# Altium PCB AdaptadorUSB1.PCBDOC
Units mm, origin at the board's own origin, x right, y up, seen from the top; angles counter-clockwise.
Board outline 152.4 x 101.6 mm, 2 copper layers (Top Layer, Bottom Layer); 15 components, 35 nets, 114 pads, 0 vias.
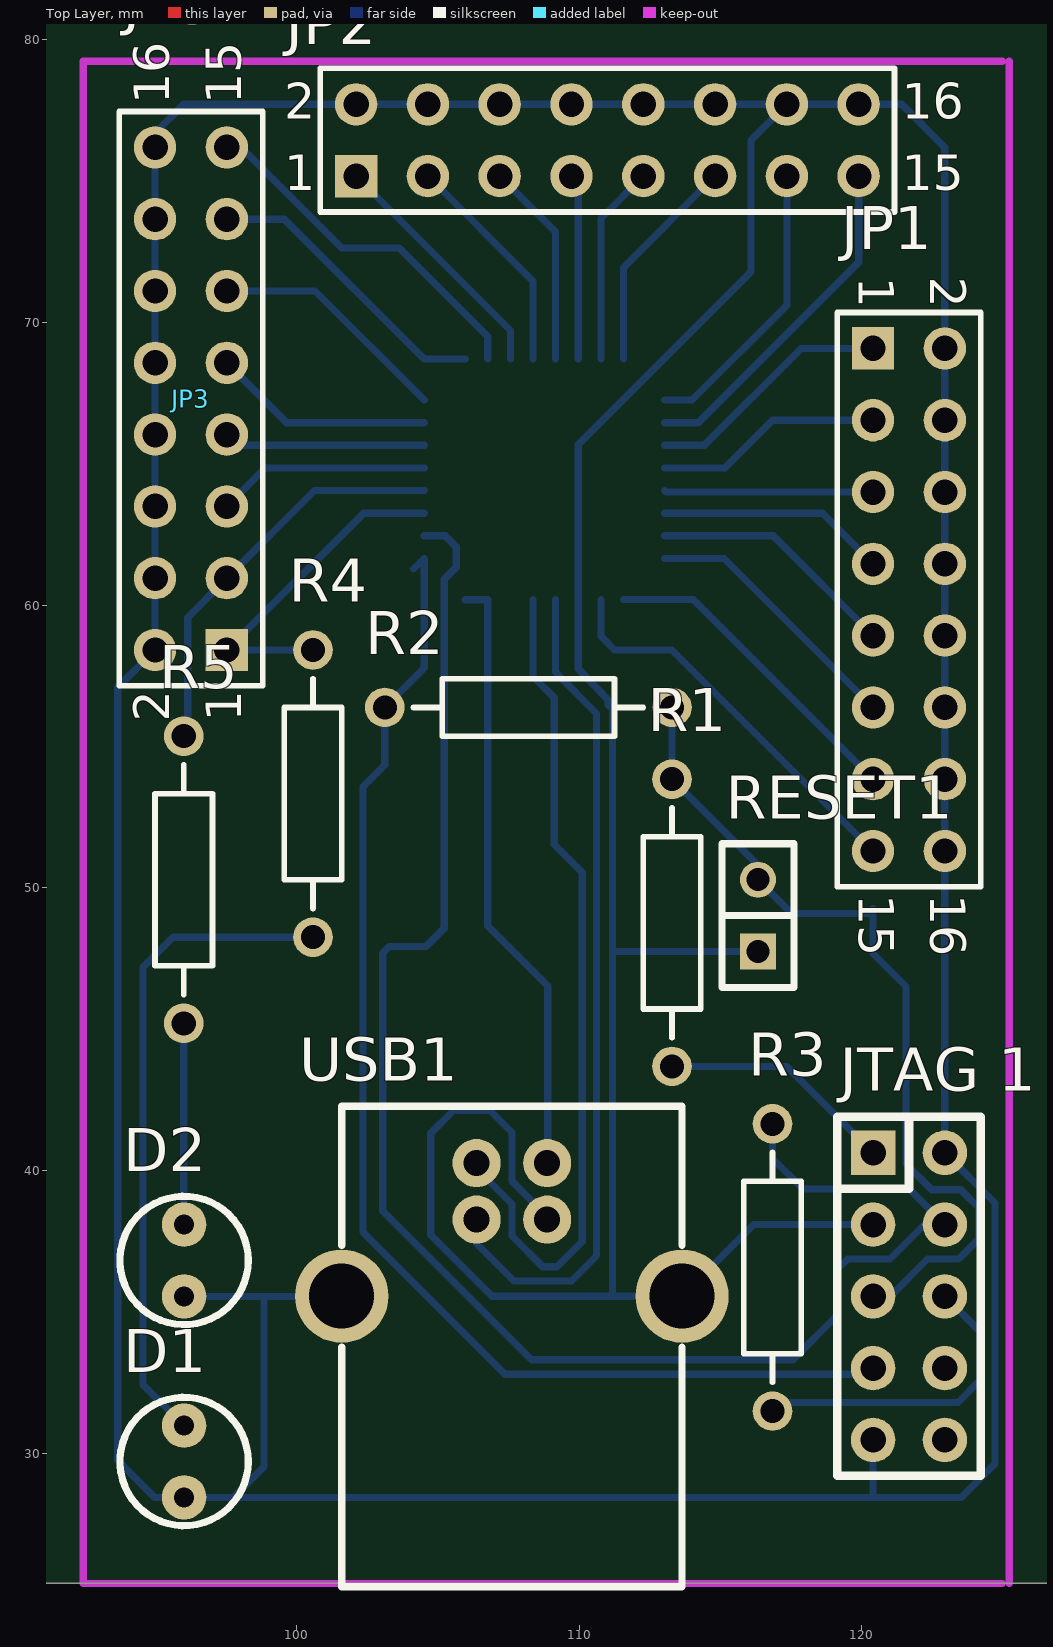
[diagram p0: Top Layer view]
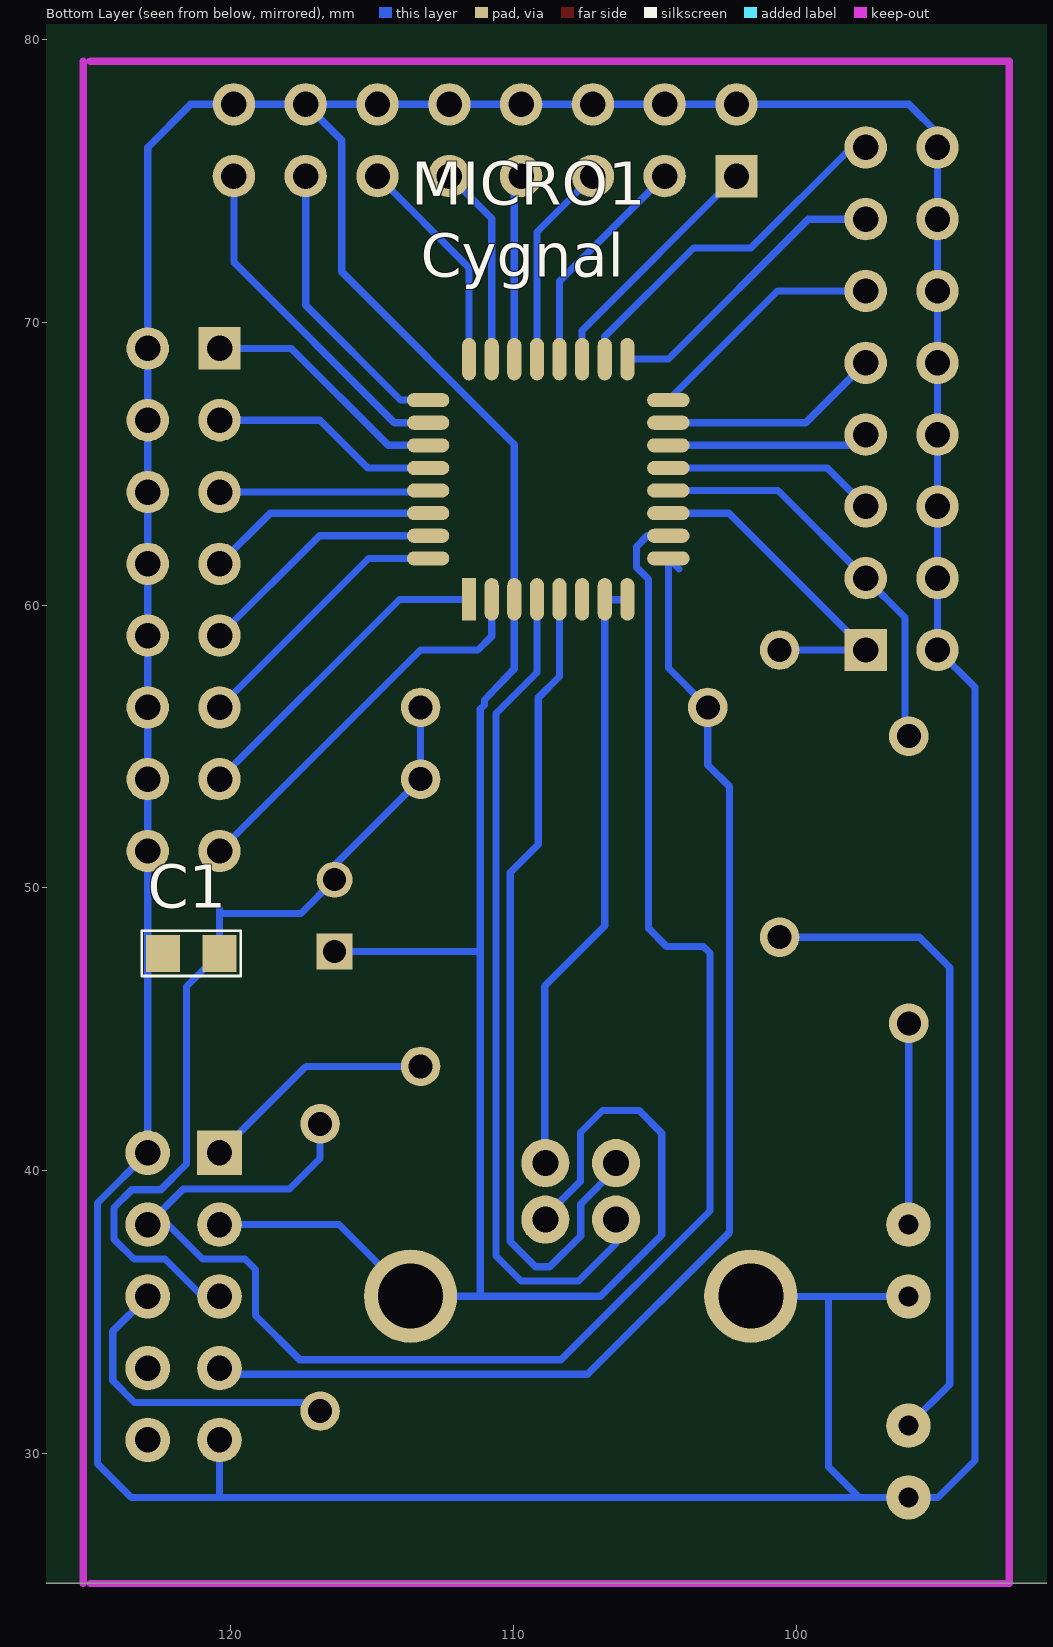
[diagram p1: Bottom Layer view, seen from below]

## Layer stack, top to bottom
Top Layer: signal copper 0.0356
Dielectric: dielectric 0.32, FR-4, Dk 4.8
Bottom Layer: signal copper 0.0356

## Board outline
25.4,25.4 177.8,25.4 177.8,127 25.4,127

## Design rules (kind name [scope] priority, off if disabled: settings)
Clearance [All] p1: gap=0.254
ComponentClearance [All] p1: gap=0.254 collisioncheckmode=0
PolygonConnect [All] p1: connectstyle=Relief reliefconductorwidth=0.254 reliefentries=4 polygonreliefangle="90 Angle"
RoutingLayers [All] p1: top layer=Horizontal bottom layer=Vertical
RoutingVias [All] p1: holewidth=0.711 width=1.27 viastyle="Through Hole" minholewidth=0.711 minwidth=1.27 maxholewidth=0.711 maxwidth=1.27
SolderMaskExpansion [All] p1: expansion=0.102
TestPointUsage [All] p1: valid=0 allowmultiple=FALSE
Testpoint [All] p1: side=15 testpointundercomponent=TRUE minsize=1.016 maxsize=2.54 preferedsize=1.524 minholesize=0 maxholesize=1.016 preferedholesize=0.813 testpointgrid=0.025 style=1023 order=-539222988
Width [All] p1: maxlimit=0.254 minlimit=0.254 preferedwidth=0.254
16 further rules are at their usual default settings.

## Components (designator, comment, footprint, x,y, rotation, side; value= is the part's Value field where it differs from the comment)
C1 "1 uF" "CAP 10" 118.872,45.212 r180 bottom
D1 "" LED 96.012,30.988 r270 top
D2 "" LED 96.012,38.1 r270 top
JP1 "Header 8X2" HDR2X8 120.396,69.088 r270 top
JP2 "Header 8X2" HDR2X8 102.108,75.184 r0 top
JP3 "Header 8X2" HDR2X8 97.536,58.42 r90 top
"JTAG 1" "" IDC-10 120.396,40.64 r270 top
MICRO1 "*" LQFP-32 112.268,60.96 r180 bottom
R1 "1K" AXIAL-0.4 113.284,48.768 r270 top
R2 "1K" AXIAL-0.4 108.204,56.388 r0 top
R3 "1 K" AXIAL-0.4 116.84,36.576 r90 top
R4 "220" AXIAL-0.4 100.584,53.34 r90 top
R5 "220" AXIAL-0.4 96.012,50.292 r90 top
RESET1 "" SIP-2 116.332,47.752 r90 top
USB1 "" USB_CON 101.6,35.56 r0 top

## Footprints (in the part's own frame and the unit in brackets; to place one, negate y for a bottom-side part, rotate by r counter-clockwise, add the part's x,y. Pads: shape width x height; smd on the part's side, far side on the other; paste and mask are expansions set on the pad)
AXIAL-0.4 [mm]
  round 1.4 hole 0.85: 1(-5.08,0) 2(5.08,0)
  silkscreen extent -4.06,-1.02 4.06,1.02
"CAP 10" [mm]
  rect 1.2x1.3 smd: 1(-1.526,2.474) 2(-3.526,2.474)
  silkscreen extent -4.28,1.67 -0.78,3.27
HDR2X8 [mm]
  rect 1.5x1.5 hole 0.9: 1(0,0)
  round 1.5 hole 0.9: 2(0,2.54) 3(2.54,0) 4(2.54,2.54) 5(5.08,0) 6(5.08,2.54) 7(7.62,0) 8(7.62,2.54) 9(10.16,0) 10(10.16,2.54) 11(12.7,0) 12(12.7,2.54) 13(15.24,0) 14(15.24,2.54) 15(17.78,0) 16(17.78,2.54)
  silkscreen extent -1.27,-1.27 19.05,3.81
IDC-10 [mil]
  rect 62x62 hole 35.43: 1(0.27,0.06)
  round 62 hole 35.43: 2(0.27,100.06) 3(100.27,0.06) 4(100.27,100.06) 5(200.27,0.06) 6(200.27,100.06) 7(300.27,0.06) 8(300.27,100.06) 9(400.27,0.06) 10(400.27,100.06)
  silkscreen extent -50,-50 450,150
LED [mil]
  round 62 hole 28: A(0.26,0.45) K(100.26,0.45)
  silkscreen extent -39,-89 140,90
LQFP-32 [mm]
  rect 0.5x1.5 smd: 1(0.7,-0.75)
  oval 0.5x1.5 smd: 2(1.5,-0.75) 3(2.3,-0.75) 4(3.1,-0.75) 5(3.9,-0.75) 6(4.7,-0.75) 7(5.5,-0.75) 8(6.3,-0.75) 17(6.3,7.75) 18(5.5,7.75) 19(4.7,7.75) 20(3.9,7.75) 21(3.1,7.75) 22(2.3,7.75) 23(1.5,7.75) 24(0.7,7.75)
  oval 1.5x0.5 smd: 9(7.75,0.7) 10(7.75,1.5) 11(7.75,2.3) 12(7.75,3.1) 13(7.75,3.9) 14(7.75,4.7) 15(7.75,5.5) 16(7.75,6.3) 25(-0.75,6.3) 26(-0.75,5.5) 27(-0.75,4.7) 28(-0.75,3.9) 29(-0.75,3.1) 30(-0.75,2.3) 31(-0.75,1.5) 32(-0.75,0.7)
SIP-2 [mil]
  rect 50x50 hole 32: 1(0.03,0.24)
  round 50 hole 32: 2(100.03,0.24)
  silkscreen extent -50,-50 150,50
USB_CON [mm]
  round 1.7 hole 0.92: 1(7.27,4.71) 2(4.77,4.71) 3(4.77,2.71) 4(7.27,2.71)
  round 3.3 hole 2.3: 5(0,0) 6(12.04,0)
  silkscreen extent 0,-10.28 12.04,6.72

## Part data
C1: library part CAP, "Capacitor"
D1 D2: library part LED
JP1 JP2 JP3: "Header, 8-Pin, Dual row"
"JTAG 1": library part CON10, "Connector"
MICRO1: library part C8051F320
R1 R2 R3 R4 R5: library part RES1
RESET1: library part SW-PB
USB1: library part CON6, "Connector"

## Nets (pads, with @x,y where several pads share a name; then routed paths per layer and width w, separated by ;. In a path a pad name is that pad's centre, name@x,y a point inside that pad or via, vN(x,y) a via of type N, cw(c..) or ccw(c..) an arc to the next point about the centre after c; other vN are vias at no path point)
GND: "JTAG 1.2" "JTAG 1.3" "JTAG 1.9" C1.2 D1.K D2.K JP1.2 JP1.4 JP1.6 JP1.8 JP1.10 JP1.12 JP1.14 JP1.16 JP2.2 JP2.4 JP2.6 JP2.8 JP2.10 JP2.12 JP2.14 JP2.16 JP3.2 JP3.4 JP3.6 JP3.8 JP3.10 JP3.12 JP3.14 JP3.16 MICRO1.3 RESET1.1 USB1.4 USB1.5 USB1.6 | length 254.9
  Top Layer w0.254: USB1.5@101.593,35.553 USB1.5
  Bottom Layer w0.254: 97.766,28.441 98.85,29.525 98.85,35.553 D2.K 101.593,35.553 USB1.5 ; USB1.4 108.87,38.38 107.625,39.625 107.625,41.35 106.85,42.125 105.55,42.125 104.75,41.325 104.75,37.725 106.915,35.56 USB1.6 ; 111.175,35.61 111.175,56.328 111.025,56.478 111.025,56.65 109.968,57.757 109.968,65.693 116.075,71.8 116.075,76.451 JP2.14 ; 111.175,47.825 111.247,47.753 RESET1.1 ; USB1.6@112.7,36.5 USB1.6 ; 120.398,38.093 116.173,38.093 USB1.6 ; 120.425,28.441 120.398,28.469 120.398,30.473 120.648,30.473 ; 123.19,40.635 122.936,40.635 ; JP2.14 JP2.16 121.412,77.724 122.936,76.2 JP1.2 JP1.4 JP1.6 JP1.8 JP1.10 JP1.12 JP1.14 JP1.16 122.936,40.635 ; JP2.14 JP2.12 JP2.10 JP2.8 JP2.6 JP2.4 JP2.2 96.012,77.724 94.996,76.708 JP3.16 JP3.14 JP3.12 JP3.10 JP3.8 JP3.6 JP3.4 JP3.2 93.675,57.099 93.675,29.75 94.984,28.441 123.516,28.441 124.71,29.635 124.71,38.861 122.936,40.635
NetC1_1: "JTAG 1.5" C1.1 R1.1 R2.2 RESET1.2 | length 30.3
  Bottom Layer w0.254: R2.2 R1.1 116.326,50.806 RESET1.2 117.519,49.1 120.398,49.1 ; 120.398,35.553 121.003,35.553 122.325,36.875 123.425,36.875 124.125,37.575 124.125,38.7 123.5,39.325 122.475,39.325 121.566,40.234 121.566,46.518 C1.1 120.398,49.274
NetD1_A: D1.A R4.1 | length 23.3
  Bottom Layer w0.254: D1.A 94.565,32.44 94.565,47.19 95.635,48.26 R4.1
NetD2_A: D2.A R5.1 | length 7.1
  Bottom Layer w0.254: R5.1 96.012,38.105 D2.A
NetJP1_1: JP1.1 MICRO1.27 | length 8.8
  Bottom Layer w0.254: MICRO1.27 114.428,65.66 117.856,69.088 JP1.1
NetJP1_3: JP1.3 MICRO1.28 | length 8.1
  Bottom Layer w0.254: MICRO1.28 115.152,64.86 116.84,66.548 JP1.3
NetJP1_5: JP1.5 MICRO1.29 | length 7.4
  Bottom Layer w0.254: MICRO1.29 113.07,64.008 JP1.5
NetJP1_7: JP1.7 MICRO1.30 | length 8.1
  Bottom Layer w0.254: MICRO1.30 118.604,63.26 JP1.7
NetJP1_9: JP1.9 MICRO1.31 | length 8.8
  Bottom Layer w0.254: MICRO1.31 116.864,62.46 JP1.9
NetJP1_11: JP1.11 MICRO1.32 | length 9.6
  Bottom Layer w0.254: MICRO1.32 115.124,61.66 JP1.11
NetJP1_13: JP1.13 MICRO1.1 | length 11.5
  Bottom Layer w0.254: MICRO1.1 114.034,60.21 JP1.13
NetJP1_15: JP1.15 MICRO1.2 | length 14.1
  Bottom Layer w0.254: MICRO1.2 110.768,58.904 111.252,58.42 113.284,58.42 JP1.15
NetJP2_1: JP2.1 MICRO1.19 | length 8.7
  Bottom Layer w0.254: JP2.1 107.568,69.724 MICRO1.19
NetJP2_3: JP2.3 MICRO1.20 | length 8
  Bottom Layer w0.254: JP2.3 108.368,71.464 MICRO1.20
NetJP2_5: JP2.5 MICRO1.21 | length 7.3
  Bottom Layer w0.254: JP2.5 109.168,73.204 MICRO1.21
NetJP2_7: JP2.7 MICRO1.22 | length 6.6
  Bottom Layer w0.254: JP2.7 109.968,74.944 MICRO1.22
NetJP2_9: JP2.9 MICRO1.23 | length 7.1
  Bottom Layer w0.254: MICRO1.23 110.768,73.684 JP2.9
NetJP2_11: JP2.11 MICRO1.24 | length 7.8
  Bottom Layer w0.254: MICRO1.24 111.568,71.944 JP2.11
NetJP2_13: JP2.13 MICRO1.25 | length 10.3
  Bottom Layer w0.254: MICRO1.25 113.996,67.26 117.348,70.612 JP2.13
NetJP2_15: JP2.15 MICRO1.26 | length 12.3
  Bottom Layer w0.254: MICRO1.26 114.212,66.46 119.888,72.136 JP2.15
NetJP3_1: JP3.15 MICRO1.18 | length 12.8
  Bottom Layer w0.254: JP3.15 98.044,76.2 101.6,72.644 103.632,72.644 106.768,69.508 MICRO1.18
NetJP3_3: JP3.13 MICRO1.17 | length 10.5
  Bottom Layer w0.254: JP3.13 99.568,73.66 104.518,68.71 MICRO1.17
NetJP3_5: JP3.5 MICRO1.13 | length 7.5
  Bottom Layer w0.254: JP3.5 98.896,64.86 MICRO1.13
NetJP3_7: JP3.7 MICRO1.14 | length 7.1
  Bottom Layer w0.254: JP3.7 97.916,65.66 MICRO1.14
NetJP3_9: JP3.9 MICRO1.15 | length 7.9
  Bottom Layer w0.254: JP3.9 99.656,66.46 MICRO1.15
NetJP3_11: JP3.11 MICRO1.16 | length 8.6
  Bottom Layer w0.254: JP3.11 100.658,71.12 MICRO1.16
NetJP3_13: JP3.3 MICRO1.12 R5.2 | length 14.5
  Bottom Layer w0.254: R5.2 96.15,55.51 96.15,59.574 JP3.3 100.636,64.06 MICRO1.12
NetJP3_15: JP3.1 MICRO1.11 R4.2 | length 12
  Bottom Layer w0.254: R4.2 JP3.1 102.376,63.26 MICRO1.11
"NetJTAG 1_4": "JTAG 1.4" MICRO1.10 R3.2 | length 59.7
  Bottom Layer w0.254: MICRO1.10 105.265,62.46 105.65,62.075 105.65,61.35 105.225,60.925 105.225,48.575 104.575,47.925 103.275,47.925 103.05,47.7 103.05,38.575 108.317,33.308 117.558,33.308 119.125,34.875 119.125,36.5 119.5,36.875 121.001,36.875 122.219,38.093 ; R3.2@116.84,42.164 116.84,40.435 117.925,39.35 121.681,39.35 122.938,38.093
"NetJTAG 1_6": "JTAG 1.6" R3.1 | length 11.2
  Bottom Layer w0.254: R3.1@116.84,32.004 117.044,31.8 123.4,31.8 124.175,32.575 124.175,34.316 122.938,35.553
"NetJTAG 1_7": "JTAG 1.7" MICRO1.9 R2.1 | length 45.5
  Bottom Layer w0.254: 104.14,61.282 MICRO1.9 104.518,57.782 R2.1 103.124,54.356 102.35,53.582 102.35,37.825 107.375,32.8 120.184,32.8 120.398,33.013
NetMICRO1_4: MICRO1.4 USB1.3 | length 29.8
  Bottom Layer w0.254: USB1.3 106.37,37.419 107.696,36.093 109.728,36.093 110.617,36.982 110.617,56.175 109.168,57.624 MICRO1.4
NetMICRO1_5: MICRO1.5 USB1.2 | length 29.8
  Bottom Layer w0.254: USB1.2 106.37,40.075 107.62,38.825 107.62,37.694 108.712,36.601 109.22,36.601 110.109,37.49 110.109,50.546 109.118,51.537 109.118,56.73 108.368,57.48 MICRO1.5
NetMICRO1_7: MICRO1.7 MICRO1.8 USB1.1 | length 21.7
  Bottom Layer w0.254: MICRO1.8 105.968,60.198 MICRO1.7@106.768,60.198 ; MICRO1.7 MICRO1.7@106.768,60.198 ; USB1.1 108.89,40.27 108.89,46.533 106.768,48.655 MICRO1.7@106.768,60.198
VCC_3.3V: "JTAG 1.1" R1.2 | length 8.4
  Bottom Layer w0.254: R1.2 117.343,43.688 120.398,40.633
pads on no net: "JTAG 1.8" "JTAG 1.10" MICRO1.6

## Keep-outs
Keep-Out Layer:
  lines w0.254: 124.968,25.4 92.456,25.4 92.456,79.248 124.968,79.248 ; 125.218,25.4 125.218,79.248

## Text inside footprints (layer, text, board x,y; h text height)
JP1: Top Overlay "16" at 122.428,49.784 h1.27 r270; Top Overlay "15" at 119.888,49.784 h1.27 r270; Top Overlay "1" at 119.888,71.628 h1.27 r270; Top Overlay "2" at 122.428,71.628 h1.27 r270
JP2: Top Overlay "16" at 121.412,77.216 h1.27; Top Overlay "15" at 121.412,74.676 h1.27; Top Overlay "1" at 99.568,74.676 h1.27; Top Overlay "2" at 99.568,77.216 h1.27
JP3: Top Overlay "16" at 95.504,77.724 h1.27 r90; Top Overlay "15" at 98.044,77.724 h1.27 r90; Top Overlay "1" at 98.044,55.88 h1.27 r90; Top Overlay "2" at 95.504,55.88 h1.27 r90
MICRO1: Bottom Overlay "Cygnal" at 113.284,71.628 h1.52